# EAGLE board OLED_Adapter_ein_Display2 (EAGLE 9.5.2)
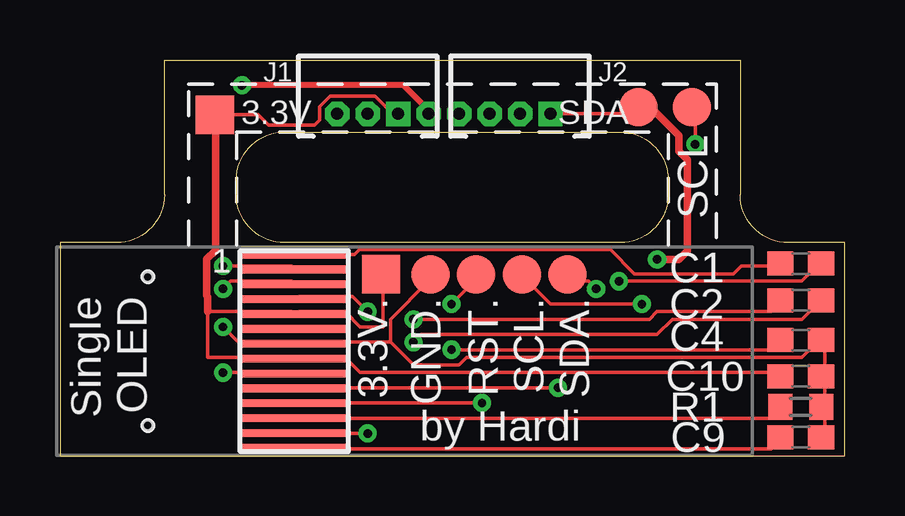
[diagram p0: board, top side]
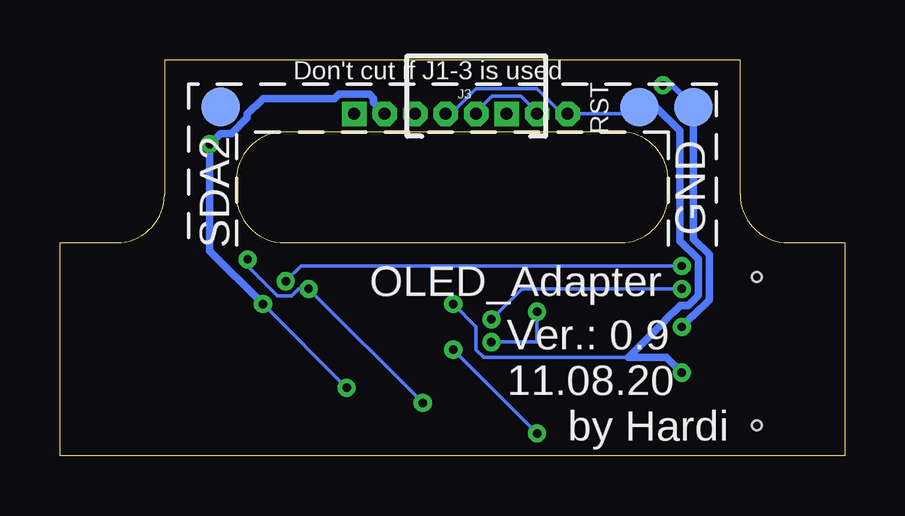
[diagram p1: board, bottom side, seen from below]

Size 32.72 x 16.5 mm. Coordinates in mm from the lower left corner, seen from the top.
Outline: 0,0 32.72,0 32.72,8.88 30.36,8.88 arc-90 28.36,10.88 28.36,16.5 4.36,16.5 4.36,10.88 arc-90 2.36,8.88 0,8.88 0,0
Outline: 23.36,8.88 9.36,8.88 arc-90 7.36,10.88 7.36,11.5 arc-90 9.36,13.5 23.36,13.5 arc-90 25.36,11.5 25.36,10.88 arc-90 23.36,8.88
Copper layers (1*16): Top 0.035mm / dielectric 1.5mm / Bottom 0.035mm
Design rules "default *": minimum track width 6mil, minimum drill 0.35mm, track to track 6mil, track to pad 6mil, pad to pad 6mil, via to via 6mil, smd to smd 6mil, copper to edge 8mil, drill to drill 6mil, minimum pad ring 10mil, minimum via ring 8mil, stop-mask expansion 4mil, vias tented up to drill 0mil, thermal gap 10mil

## Footprints (pad centres in the part's own frame; a part is rotated, then mirrored left to right if it is on the bottom)
TP16SQ = smd 1.6 x 1.6: TP 0,0
C0603 = smd 1.1 x 1: 1 -0.85,0; 2 0.85,0
TP16R = smd 1.6 x 1.6: TP 0,0
OLED_FLEX_W_DISP = smd 4.5 x 0.32: 1 0,0; 2 0,-0.62; 3 0,-1.24; 4 0,-1.86; 5 0,-2.48; 6 0,-3.1; 7 0,-3.72; 8 0,-4.34; 9 0,-4.96; 10 0,-5.58; 11 0,-6.2; 12 0,-6.82; 13 0,-7.44; 14 0,-8.06 | hole 0.4: -6.1,-0.93; -6.1,-7.13
MINI = drill 0.5 pad 1.016 square: 1 -1.27,0 | drill 0.5 pad 1.016 octagon: 2 0,0; 3 1.27,0
R0603 = smd 1 x 1.1: 1 -0.85,0; 2 0.85,0

## Placement (x,y rotation side)
3.3V  3.3V  [TP16SQ]  6.46,14.22 0 top
3.3V.  TPTP16SQ  [TP16SQ]  13.39,7.56 0 top
C1  470nF  [C0603]  30.88,8 180 top
C2  470nF  [C0603]  30.88,6.48 180 top
C4  2.2uF  [C0603]  30.88,4.83 180 top
C9  4.7uF  [C0603]  30.88,0.76 0 top
C10  4.7uF  [C0603]  30.88,3.3 0 top
GND  GND  [TP16R]  6.3,14.53 0 bottom
GND.  TPTP16R  [TP16R]  15.45,7.56 0 top
IC1  OLED_FLEXW_DISP  [OLED_FLEX_W_DISP]  9.77,8.38 0 top
J1  SV3  [MINI]  12.83,14.26 180 top
J2  SV3  [MINI]  19.18,14.26 180 top
J3  SV3  [MINI]  15.37,14.26 180 bottom
R1  560K  [R0603]  30.88,2.03 180 top
RST  RST  [TP16R]  8.56,14.53 0 bottom
RST.  TPTP16R  [TP16R]  17.35,7.56 0 top
SCL  SCL  [TP16R]  26.34,14.53 0 top
SCL.  TPTP16R  [TP16R]  19.26,7.56 0 top
SDA  SDA  [TP16R]  24.12,14.53 0 top
SDA2  SDA2  [TP16R]  26.02,14.54 0 bottom
SDA.  TPTP16R  [TP16R]  21.16,7.56 0 top

## Library data of the parts
3.3V 3.3V. GND GND. RST RST. SCL SCL. SDA SDA2 SDA. = testpad
C1 C2 C4 C9 C10 = resistor
IC1 = OLED_Flex
J1-J3 = SparkFun-Connectors
R1 = rcl; SPICEPREFIX: R

## Nets
3.3V: 3.3V..TP 3.3V.TP C10.1 IC1.5 IC1.8 J1.1 J3.1
GND: C4.1 C9.2 C10.2 GND..TP GND.TP IC1.7 J1.2 J3.2 R1.1
N$1: IC1.12 R1.2
N$3: C1.2 IC1.1
N$4: C1.1 IC1.2
N$5: C2.2 IC1.3
N$6: C2.1 IC1.4
N$7: C9.1 IC1.14
N$8: C4.2 IC1.13
RES#: IC1.9 J1.3 J3.3 RST..TP RST.TP
SCL: IC1.10 J2.2 SCL..TP SCL.TP
SDA: IC1.11 J2.1 SDA..TP SDA.TP

## Tracks (layer width: path | path; a pad name or v marks a point on that pad's centre or on a via)
3.3V
  Top 0.152: 6.48,14.26 3.3V.TP 8.27,14.22 8.7,13.78 10.61,13.78 10.82,13.99 10.82,14.56 11.25,14.99 13.13,14.99 13.87,14.26 J3.1 | 3.3V..TP 13.46,7.27 13.46,5.37 12.51,5.37 11.88,6 9.97,6 IC1.5 9.65,6 6.16,6 6.16,4.1 9.65,4.1 IC1.8 9.97,4.1 11.88,4.1 12.51,3.46 29.97,3.46 C10.1
  Top 0.305: 6.16,6 6.16,6.62 6.12,6.67 6.12,8.19 6.48,8.55 6.48,14.26
GND  (via drill 0.35)
  Top 0.152: C9.2 31.88,0.92 31.88,1.87 R1.1 31.88,2.19 31.88,3.14 C10.2 31.88,3.46 31.88,4.73 C4.1 31.56,4.73 30.93,4.1 16.96,4.1 16.64,3.78 14.73,3.78 13.78,4.73 | 13.78,4.73 13.78,5.68 15.37,7.27 GND..TP | 13.78,4.73 9.97,4.73 IC1.7 9.65,4.73 7.43,4.73 v6.8,5.37
  Top 0.254: v7.59,15.44 14.32,15.44 15.37,14.4 J3.2
  Bottom 0.152: J3.2 15.37,14.32 14.7,14.99 13.5,14.99 12.83,14.32 J1.2
  Bottom 0.254: GND.TP 7.21,15.44 v7.59,15.44
  Bottom 0.305: v6.8,5.37 6.35,5.81 6.33,5.81 5.66,6.48 5.66,8.38 6.31,9.03 GND.TP
N$1
  Top 0.152: R1.2 29.97,1.87 29.66,1.56 9.97,1.56 IC1.12
N$3
  Top 0.152: IC1.1 12.2,8.38 | 12.2,8.38 12.29,8.38 12.49,8.59 22.95,8.59 23.95,7.58 28.07,7.58 28.4,7.91 29.93,7.91 C1.2 | 12.2,8.38
N$4  (via drill 0.35)
  Top 0.152: v23.31,7.27 30.93,7.27 31.56,7.91 C1.1 | v6.8,7.91 9.65,7.91 IC1.2
  Bottom 0.152: v23.31,7.27 22.67,7.91 v6.8,7.91
N$5  (via drill 0.35)
  Top 0.152: v14.73,5.68 24.58,5.68 24.89,6 29.66,6 29.97,6.32 C2.2 | v6.8,6.95 7.12,7.27 9.65,7.27 IC1.3
  Bottom 0.152: v14.73,5.68 13.46,6.95 v6.8,6.95
N$6  (via drill 0.35)
  Top 0.152: v14.73,4.73 15.05,5.05 24.89,5.05 25.53,5.68 30.93,5.68 31.56,6.32 C2.1 | v12.83,6 12.2,6.64 9.97,6.64 IC1.4
  Bottom 0.152: v14.73,4.73 12.83,4.73 v12.83,6
N$7
  Top 0.152: C9.1 29.97,0.6 29.66,0.29 9.97,0.29 IC1.14
N$8  (via drill 0.35)
  Top 0.152: v16.32,4.41 29.66,4.41 29.97,4.73 C4.2 | v12.83,0.92 9.97,0.92 IC1.13
  Bottom 0.152: v12.83,0.92 v16.32,4.41
RES#  (via drill 0.35)
  Top 0.152: v16.32,6.32 17.27,7.27 RST..TP | v6.8,3.46 9.65,3.46 IC1.9
  Bottom 0.152: v16.32,6.32 15.37,5.37 15.37,4.41 15.05,4.1 9.02,4.1 | RST.TP 8.7,14.26 J1.3 11.79,14.26 12.83,15.3 15.37,15.3 16.41,14.26 J3.3
  Bottom 0.305: RST.TP 7.87,14.53 6.88,13.54 6.88,8.95 6.12,8.19 6.12,6.67 6.52,6.27 6.86,6.27 7.48,5.65 7.48,5.64 9.02,4.1 7.43,4.1 v6.8,3.46
SCL  (via drill 0.35)
  Top 0.152: v24.26,6.32 20.45,6.32 19.5,7.27 SCL..TP | v26.48,12.99 26.48,14.26 SCL.TP | v20.77,2.83 9.97,2.83 IC1.10
  Bottom 0.152: v24.26,6.32 v20.77,2.83
  Bottom 0.305: J2.2 19.64,14.71 19.64,14.89 19.82,15.07 21.08,15.07 21.26,14.89 24.26,14.89 24.92,14.23 24.92,14.08 25.56,13.44 26.03,13.44 v26.48,12.99 26.48,8.54 v24.26,6.32
SDA  (via drill 0.35)
  Top 0.152: J2.1 23.94,14.26 SDA.TP | v17.59,2.19 9.97,2.19 IC1.11 | v22.36,6.95 22.04,7.27 21.4,7.27 SDA..TP
  Top 0.305: SDA.TP 24.62,14.53 25.8,13.35 25.8,12.7 26.16,12.34 26.16,8.54 25.81,8.18 v24.89,8.18
  Bottom 0.152: v17.59,2.19 v22.36,6.95 22.77,6.95 23.06,6.66 23.65,6.66 24.89,7.91 v24.89,8.18

## Text on the board
tPlace: Single / OLED | by Hardi
bPlace: Don't cut if J1-3 is used | OLED_Adapter | Ver.: 0.9 | 11.08.20 | by Hardi